# Altium PCB InterfaceComUsuario.PcbDoc
Units mm, origin at the board's own origin, x right, y up, seen from the top; angles counter-clockwise.
Board outline 65.02 x 120.02 mm, 2 copper layers (Top Layer, Bottom Layer); 33 components, 38 nets, 130 pads, 14 vias.
Unrouted connection lines stored in the file: 5.
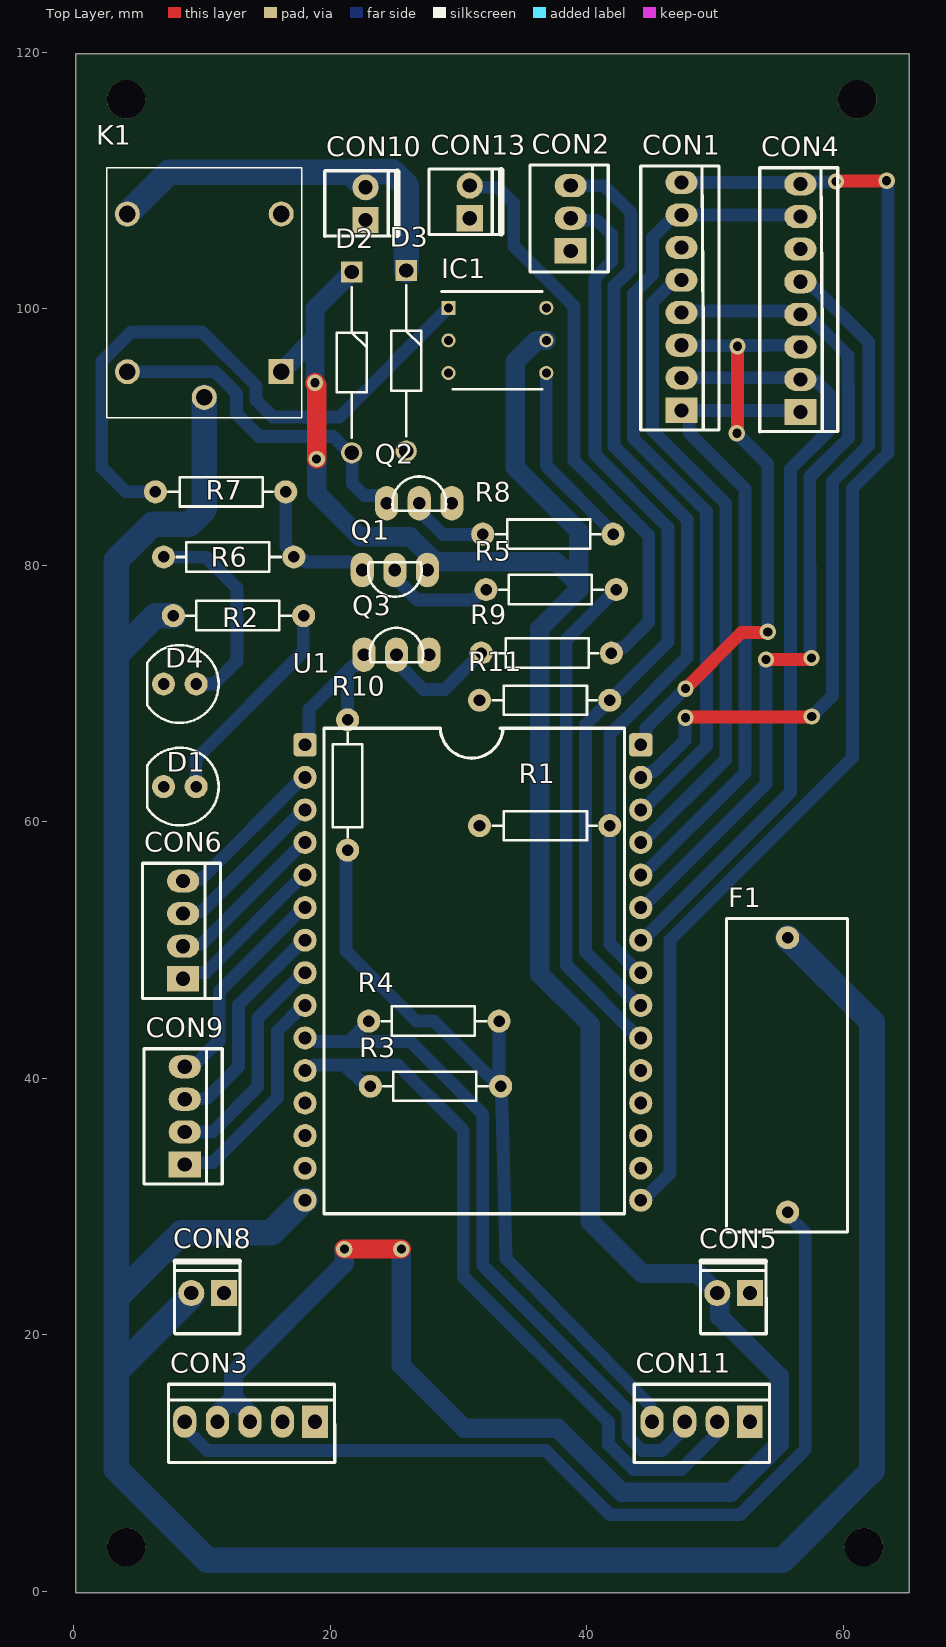
[diagram p0: Top Layer view]
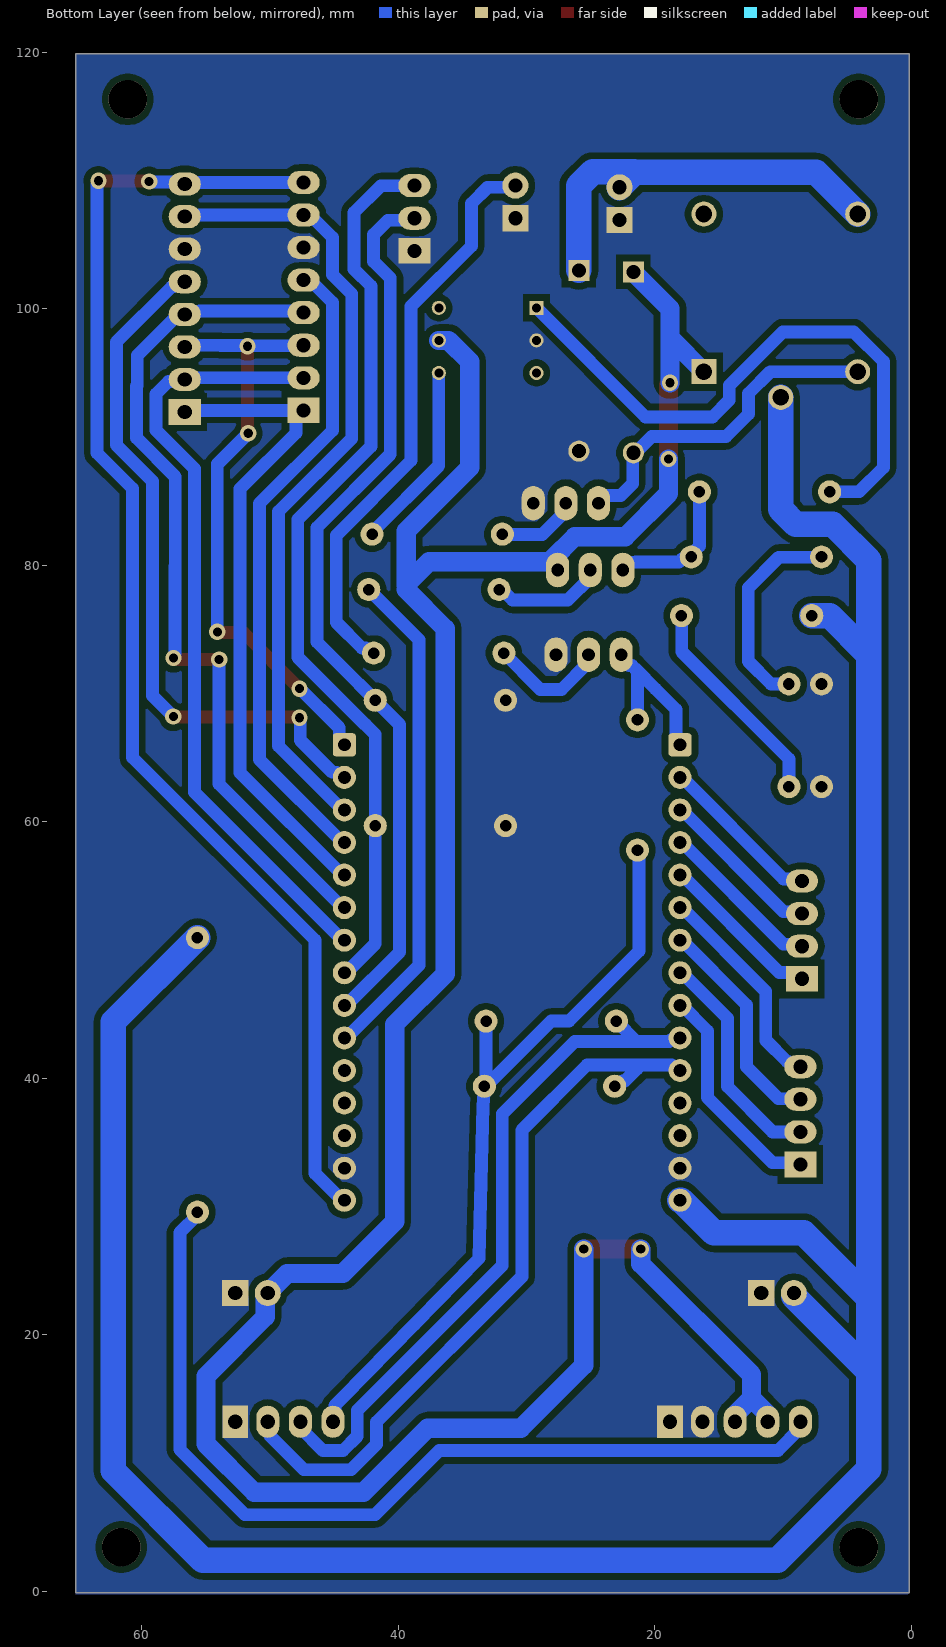
[diagram p1: Bottom Layer view, seen from below]

## Layer stack, top to bottom
Top Solder: solder mask 0.0102, Solder Resist, Dk 3.5
Top Layer: signal copper 0.0356
Dielectric 1: dielectric 0.32, FR-4, Dk 4.8
Bottom Layer: signal copper 0.0356
Bottom Solder: solder mask 0.0102, Solder Resist, Dk 3.5

## Board outline
0.127,-0.127 65.151,-0.127 65.151,119.888 0.127,119.888

## Design rules (kind name [scope] priority, off if disabled: settings)
Clearance [All] p1: gap=0.5 ignorepadtopadclearanceinfootprint=FALSE except(0: Arc-Text Arc-Hole Track-Text Track-Hole SMDPad-Text SMDPad-Hole THPad-Text THPad-Hole Via-Text Via-Hole Fill-Text Fill-Hole Poly-Text Poly-Hole Region-Text Region-Hole Text-Text Text-Hole)
ComponentClearance [All] p1: gap=0.3 collisioncheckmode=3 verticalgap=0.254 showdistances=FALSE
HoleSize [All] p1: absolutevalues=TRUE maxlimit=3 minlimit=0.75 maxpercent=80.000 minpercent=20.000
HoleToHoleClearance [All] p1: gap=0.1 allowstackedmicrovias=TRUE
MinimumSolderMaskSliver [All] p1: minsoldermaskwidth=0.05
PolygonConnect [All] p1: connectstyle=Relief reliefconductorwidth=0.254 reliefentries=4 polygonreliefangle="90 Angle" airgapwidth=0.254
RoutingVias [All] p1: holewidth=0.9 width=2 viastyle="Through Hole" minholewidth=0.9 minwidth=2 maxholewidth=0.9 maxwidth=2
SilkToSilkClearance [All] p1: silktosilkclearance=0
SilkToSolderMaskClearance [IsPad] p1: minsilkscreentomaskgap=0 clearancetoexposedcopper=TRUE
SolderMaskExpansion [All] p1: expansion=0.102 istentingtop=FALSE
Width [All] p1: maxlimit=4 minlimit=0.7 preferedwidth=1 minimp=50.000000 maximp=50.000000 favimp=50.000000
24 further rules are at their usual default settings.

## Components (designator, comment, footprint, x,y, rotation, side; value= is the part's Value field where it differs from the comment)
CON1 "KK_2.54_8vias" KK_8vias_180° 47.371,92.075 r90 top
CON2 "KK_2.54_3vias" KK_3vias_180º 38.735,104.521 r90 top
CON3 "KK_2.54_5vias" KK_5vias_180° 18.796,13.208 r180 top
CON4 "KK_2.54_8vias" KK_8vias_180° 56.642,91.948 r90 top
CON5 "KK_2.54_2vias" KK_2VIAS_180º 52.705,23.241 r180 top
CON6 "KK_2.54_4vias" KK_4vias_180° 8.509,47.752 r90 top
CON8 "KK_2.54_2vias" KK_2VIAS_180º 11.684,23.241 r180 top
CON9 "KK_2.54_4vias" KK_4vias_180° 8.636,33.274 r90 top
CON10 "KK_2.54_2vias" KK_2VIAS_180º 22.733,106.934 r90 top
CON11 "KK_2.54_4vias" KK_4vias_180° 52.705,13.208 r180 top
CON13 "KK_2.54_2vias" KK_2VIAS_180º 30.861,107.061 r90 top
D1 "LED 5MM RED" "LED 5MM RED" 8.255,62.738 r180 top
D2 "1N4007-E3_53" DIOAD1405W89L465D235 21.658,102.87 r270 top
D3 "1N4007-E3_53" DIOAD1405W89L465D235 25.908,102.997 r270 top
D4 "LED 5MM RED" "LED 5MM RED" 8.255,70.739 r180 top
F1 "Fuse 5x20" "Fuse 5x20" 55.626,40.005 r270 top
IC1 "4N25" DIP762W50P254L712H450Q6N 33.02,97.536 r0 top
K1 "rele T73" JQC3FT731Z12VDC 16.16,95.091 r90 top
Q1 "BC549" TO92 25.019,79.629 r180 top
Q2 "BC549" TO92 26.924,84.836 r0 top
Q3 "BC549" TO92 25.146,73.025 r0 top
R1 "RES 470R 1/4W CARBON FILM" "RES 470R 1/4W CARBON FILM" 36.703,59.69 r0 top
R2 "RES 470R 1/4W CARBON FILM" "RES 470R 1/4W CARBON FILM" 12.827,76.073 r180 top
R3 "4.7K" "RES 4.7K 1/4W CARBON FILM" 28.194,39.37 r180 top
R4 "4.7K" "RES 4.7K 1/4W CARBON FILM" 28.067,44.45 r180 top
R5 "RES 470R 1/4W CARBON FILM" "RES 470R 1/4W CARBON FILM" 37.211,78.105 r180 top
R6 "RES 470R 1/4W CARBON FILM" "RES 470R 1/4W CARBON FILM" 12.065,80.645 r180 top
R7 "RES 470R 1/4W CARBON FILM" "RES 470R 1/4W CARBON FILM" 11.43,85.725 r0 top
R8 "RES 470R 1/4W CARBON FILM" "RES 470R 1/4W CARBON FILM" 36.957,82.423 r0 top
R9 "RES 470R 1/4W CARBON FILM" "RES 470R 1/4W CARBON FILM" 36.83,73.152 r0 top
R10 "RES 470R 1/4W CARBON FILM" "RES 470R 1/4W CARBON FILM" 21.336,62.865 r270 top
R11 "RES 470R 1/4W CARBON FILM" "RES 470R 1/4W CARBON FILM" 36.703,69.469 r0 top
U1 "microcontrolador" ESP32_Desvikit_v1 18.021,66 r0 top value="ESP32 Desvikit V1"

## Footprints (in the part's own frame and the unit in brackets; to place one, negate y for a bottom-side part, rotate by r counter-clockwise, add the part's x,y. Pads: shape width x height; smd on the part's side, far side on the other; paste and mask are expansions set on the pad)
DIOAD1405W89L465D235 [mm]
  rect 1.65x1.65 hole 1.1: 1(0,0)
  round 1.65 hole 1.1: 2(14.1,0)
  silkscreen extent 1.17,-1.17 12.93,1.17, body extent -0.44,-1.35 14.5,1.35, height 2.69
DIP762W50P254L712H450Q6N [mm]
  rect 1.1x1.1 hole 0.7: 1(-3.81,2.54)
  round 1.1 hole 0.7: 2(-3.81,0) 3(-3.81,-2.54) 4(3.81,-2.54) 5(3.81,0) 6(3.81,2.54)
  silkscreen extent -4.36,-3.81 3.5,3.81, body extent -3.94,-3.56 3.94,3.56, height 4.5
ESP32_Desvikit_v1 [mm]
  rrect25% 1.8x1.8 hole 1: 1(0,0) 30(26.175,0)
  round 1.8 hole 1: 2(0,-2.54) 3(0,-5.08) 4(0,-7.62) 5(0,-10.16) 6(0,-12.7) 7(0,-15.24) 8(0,-17.78) 9(0,-20.32) 10(0,-22.86) 11(0,-25.4) 12(0,-27.94) 13(0,-30.48) 14(0,-33.02) 15(0,-35.52) 16(26.175,-35.52) 17(26.175,-33.02) 18(26.175,-30.48) 19(26.175,-27.94) 20(26.175,-25.4) 21(26.175,-22.86) 22(26.175,-20.32) 23(26.175,-17.78) 24(26.175,-15.24) 25(26.175,-12.7) 26(26.175,-10.16) 27(26.175,-7.62) 28(26.175,-5.08) 29(26.175,-2.54)
  silkscreen extent 1.47,-36.57 24.9,1.31, body extent -1.2,-46.07 27.48,4.86, height 16.2
"Fuse 5x20" [mm] "Connector; Header; 5 Position"
  round 1.8 hole 0.9: 1(-10.95,0.025) 2(10.45,0.025)
  silkscreen extent -12.45,-4.75 12,4.7, body extent -12.42,-4.78 11.97,4.63, height 12
JQC3FT731Z12VDC [mm]
  rect 1.95x1.95 hole 1.3: 1(0,0)
  round 1.95 hole 1.3: 2(-2,6) 3(0,12) 4(12.3,0) 5(12.3,12)
  silkscreen extent -3.6,-1.62 15.9,13.62, body extent -3.6,-1.62 15.9,13.62, height 15.6
KK_2VIAS_180º [mil]
  rect 80x80 hole 43.31: 1(0,0)
  round 80 hole 43.31: 2(100,0)
  silkscreen extent -50,-101 151,125, body extent -61,-108 165,128, height 464
KK_3vias_180º [mm]
  rect 2x2.5 hole 1.1: 1(0,0)
  oval 1.8x2.5 hole 1.1: 2(2.54,0) 3(5.08,0)
  silkscreen extent -1.65,-2.92 6.69,3.18, body extent -1.6,-2.95 6.69,3.05, height 11.9
KK_4vias_180° [mm]
  rect 2x2.5 hole 1.1: 1(0,0)
  oval 1.8x2.5 hole 1.1: 2(2.54,0) 3(5.08,0) 4(7.62,0)
  silkscreen extent -1.53,-2.92 9.02,3.18, body extent -1.4,-2.79 8.76,3.01, height 10.12
KK_5vias_180° [mm]
  rect 2x2.5 hole 1.1: 1(0,0)
  oval 1.8x2.5 hole 1.1: 2(2.54,0) 3(5.08,0) 4(7.62,0) 5(10.16,0)
  silkscreen extent -1.53,-2.92 11.43,3.18, body extent -1.4,-2.79 11.3,3.01, height 10.12
KK_8vias_180° [mm]
  rect 2x2.5 hole 1.1: 1(0,0)
  oval 1.8x2.5 hole 1.1: 2(2.54,0) 3(5.08,0) 4(7.62,0) 5(10.16,0) 6(12.7,0) 7(15.24,0) 8(17.78,0)
  silkscreen extent -1.53,-2.92 19.05,3.18, body extent -1.4,-2.74 18.92,3.1, height 10.1
"LED 5MM RED" [mm]
  round 1.8 hole 0.9: 1(-1.27,0) 2(1.27,0)
  silkscreen extent -3.03,-3.03 2.54,3.03, body extent -2.98,-3.01 2.44,3.01, height 9.31
"RES 4.7K 1/4W CARBON FILM" [mm]
  round 1.8 hole 0.9: 1(-5.08,0) 2(5.08,0)
  silkscreen extent -4.06,-1.14 4.06,1.14, body extent -5.47,-1.27 5.47,1.27, height 3.27
"RES 470R 1/4W CARBON FILM" [mm]
  round 1.8 hole 0.9: 1(-5.08,0) 2(5.08,0)
  silkscreen extent -4.06,-1.14 4.06,1.14, body extent -5.47,-1.27 5.47,1.27, height 3.27
TO92 [mm]
  oval 1.8x2.7 hole 1: 1(-2.54,0) 2(0,0) 3(2.54,0)
  silkscreen extent -2.09,-0.6 2.09,2.08, body extent -2.74,-0.57 2.74,2.04, height 6.83

## Part data
CON1 CON4: "Conector KK 2.54mm 8 vias", Descrição="Conector KK 3 vias com passo 2.54mm", Encapsulamento="PTH - 180º", Modelo="3 vias - 180º", Valor="KK 8 vias 180º"
CON2: "Conector KK 2.54mm 3 vias", Descrição="Conector KK 3 vias com passo 2.54mm", Encapsulamento="PTH - 180º", Modelo="3 vias - 180º", Valor="KK 3 vias 180º"
CON3: "Conector KK 2.54mm 5 vias", Descrição="Conector KK 3 vias com passo 2.54mm", Encapsulamento="PTH - 180º", Modelo="3 vias - 180º", Valor="KK 5 vias 180º"
CON5 CON8 CON10 CON13: "Conector KK 2.54mm 2 vias", Descrição="Conector KK 3 vias com passo 2.54mm", Encapsulamento="PTH - 180º", Modelo="2 vias - 180º", Valor="KK 2 vias 180º"
CON6 CON9 CON11: "Conector KK 2.54mm 4 vias", Descrição="Conector KK 3 vias com passo 2.54mm", Encapsulamento="PTH - 180º", Modelo="3 vias - 180º", Valor="KK 4 vias 180º"
D1 D4: Current If Luminous Intensity=2, Forward Current If=20, Forward Voltage VF Max=2.5, LED Colour=Red, Manufacturer=Paralight, Manufacturer Part Number=IMP585, Operating Temperature Max=85, Operating Temperature Min=-40, Operating Temperature Range="-40°C to +85", Peak Forward Current=7, Supplier Part Number 1="Led 3mm Vermelho Difuso L-314HD - Paralight", Voltage Vf Typ="2.2V<!--FANDB--><div class=\"features-and-benefits-container\"><div class=\"features-and-benefits-description\"><span class=\"features-benefits-value\">The L-934LID from Kingbright is a through hole round shape high efficiency red colour LED. The device is made of gallium arsenide phosphide on gallium phosphide orange light emitting diode. This LED is widely used because of low power consumption, long life and solid state reliability.</span></div><div class=\"features-and-benefits-list\"><ul class=\"features-and-benefits-list-list\"><li class=\"features-and-benefits-list-item\">Standard bulb size of T-1 (3mm)</li><li class=\"features-and-benefits-list-item\">Reliable and rugged</li><li class=\"features-and-benefits-list-item\">Viewing angle is 60°</li><li class=\"features-and-benefits-list-item\">Luminous intensity of 3mcd at 2mA</li><li class=\"features-and-benefits-list-item\">Forward voltage is 2.0V</li><li class=\"features-and-benefits-list-item\">Forward current (If) is 20mA</li><li class=\"features-and-benefits-list-item\">Dominant wavelength is 625nm at IF=20mA</li><li class=\"features-and-benefits-list-item\">Peak wavelength is 627nm at IF=20", Bulb Size=3mm, ComponentLink1Description=http://loja.multcomercial.com.br/led-3mm-vermelho-difuso-l-314hd-paralight.html, ComponentLink1URL=http://loja.multcomercial.com.br/led-3mm-vermelho-difuso-l-314hd-paralight.html, Dominant Wavelength=625, External Diameter=2.9, External Length / Height=4.6, Forward Current If Max=20, Forward Voltage=2, Lead Cross-section Depth=0.5, Lead Cross-section Width=0.5, Lead Spacing=2.54, LED / Lamp Size="3mm / T-1", LED Mounting="Through Hole", LED Type=Standard, Lens Shape=Round, Luminous Intensity=3, Luminous Intensity @ If Min=0.7, Luminous Intensity Typ=3, Mounting Type="PCB Through Hole", MSL=-, No. of Pins=2, Packaging=Each, Peak Wavelength=625, PIV Max=5, Pricing 1="1=0.15 (BRL)", RoHS=YES, Stock 1=35260, Supplier 1="Mult Comercial", SVHC="No SVHC (15-Jun-2015)", Viewing Angle=60°, Wavelength Typ=625
D2 D3: "Diode", Arrow Part Number=1N4007-E3/53, Manufacturer_Name=Vishay, Mouser Part Number=625-1N4007-E3/53, Arrow Price/Stock=https://www.arrow.com/en/products/1n4007-e353/vishay, Datasheet Link=http://www.vishay.com/docs/88503/1n4001.pdf, Manufacturer_Part_Number=1N4007-E3/53, Mouser Price/Stock=https://www.mouser.co.uk/ProductDetail/Vishay-General-Semiconductor/1N4007-E3-53/?qs=N4vtoAxH%2FSpFgYSIWmQOdg%3D%3D
F1: "Fuse", Manufacturer_Name=QIANJI, Manufacturer_Part_Number=JQC-3F-(T73)-1Z-12VDC, Datasheet Link=https://img.ozdisan.com/ETicaret_Dosya/341245_8627675.pdf, Height=15.5mm
IC1: "Integrated Circuit", Manufacturer_Name=Isocom, Arrow Part Number=4N25, Arrow Price/Stock=https://www.arrow.com/en/products/4n25/isocom, Datasheet Link=http://www.farnell.com/datasheets/90919.pdf, Height=4.5mm, Manufacturer_Part_Number=4N25
K1: "Relay or Contactor", Manufacturer_Name=QIANJI, Manufacturer_Part_Number=JQC-3F-(T73)-1Z-12VDC, Datasheet Link=https://img.ozdisan.com/ETicaret_Dosya/341245_8627675.pdf, Height=15.5mm
Q1 Q2 Q3: "TRANS NPN 30V 0.1A TO-92", Collector- Base Voltage VCBO="30 V", Collector-Emitter Saturation Voltage="200 mV", DC Current Gain hFE Max=800, Emitter- Base Voltage VEBO="5 V", Manufacturer="Fairchild Semiconductor", Maximum DC Collector Current="0.1 A", Maximum Operating Temperature="+ 150 C", Maximum Power Dissipation="0.5 W", Minimum Operating Temperature="- 65 C", Package / Case=TO-92-3, Supplier Part Number 1=512-BC549, Brand="Fairchild Semiconductor", Collector- Emitter Voltage VCEO Max="30 V", ComponentLink1Description=https://datasheet.ciiva.com/982/bc546-982130.pdf, ComponentLink1URL=https://datasheet.ciiva.com/982/bc546-982130.pdf, ComponentLink2Description=https://datasheet.ciiva.com/17179/bc549-17179663.pdf, ComponentLink2URL=https://datasheet.ciiva.com/17179/bc549-17179663.pdf, Configuration=Single, DC Collector/Base Gain hfe Min=110, Factory Pack Quantity=2000, Gain Bandwidth Product fT="300 MHz", Manufacturer Part Number=BC549, Mounting Style="Through Hole", Packaging=Bulk, Product Category="Bipolar Transistors - BJT", RoHS=Details, Series=BC549, Supplier 1=Mouser, Transistor Polarity=NPN
R1 R11: "RES 470R OHM 1/4W 5% CARBON FILM", Manufacturer=Ty-Ohm, Manufacturer Part Number=CR25, Operating Temperature="-55°C ~ 155°C", Package / Case=Axial, Power (Watts)="0.25W, 1/4W", Resistance (Ohms)=470R, Supplier Part Number 1="Resistor de Filme de Carbono 1/4 de Watt CR25 5% de tolerância - 0.22R Ω à 10M Ω", Temperature Coefficient="0/ -500ppm/°C", Tolerance=±5%, Category=Resistors, ComponentLink1Description=http://loja.multcomercial.com.br/resistor-de-1-4-de-watt-cr25-5-de-tolerancia.html, ComponentLink1URL=http://loja.multcomercial.com.br/resistor-de-1-4-de-watt-cr25-5-de-tolerancia.html, Composition="Carbon Film", Features="Flame Retardant Coating, Safety", Height=-, Number of Terminations=2, Packaging="Cut Tape (CT)", Pricing 1="1=0.20 (BRL)", RoHS="RoHS Compliant", Size / Dimension="0.091\" Dia x 0.256\" L (2.30mm x 6.50mm)", Stock 1=617543, Supplier 1="Mult Comercial", Supplier Device Package=Axial
R2: "RES 470R OHM 1/4W 5% CARBON FILM", Manufacturer=Ty-Ohm, Manufacturer Part Number=CR25, Operating Temperature="-55°C ~ 155°C", Package / Case=Axial, Power (Watts)="0.25W, 1/4W", Resistance (Ohms)=910R, Supplier Part Number 1="Resistor de Filme de Carbono 1/4 de Watt CR25 5% de tolerância - 0.22R Ω à 10M Ω", Temperature Coefficient="0/ -500ppm/°C", Tolerance=±5%, Category=Resistors, ComponentLink1Description=http://loja.multcomercial.com.br/resistor-de-1-4-de-watt-cr25-5-de-tolerancia.html, ComponentLink1URL=http://loja.multcomercial.com.br/resistor-de-1-4-de-watt-cr25-5-de-tolerancia.html, Composition="Carbon Film", Features="Flame Retardant Coating, Safety", Height=-, Number of Terminations=2, Packaging="Cut Tape (CT)", Pricing 1="1=0.20 (BRL)", RoHS="RoHS Compliant", Size / Dimension="0.091\" Dia x 0.256\" L (2.30mm x 6.50mm)", Stock 1=617543, Supplier 1="Mult Comercial", Supplier Device Package=Axial
R3 R4: library part "RES 4.7K 1/4W CARBON FILM", "RES 4.7K OHM 1/4W 5% CARBON FILM", Manufacturer=Ty-Ohm, Manufacturer Part Number=CR25, Operating Temperature="-55°C ~ 155°C", Package / Case=Axial, Power (Watts)="0.25W, 1/4W", Resistance (Ohms)=?, Supplier Part Number 1="Resistor de Filme de Carbono 1/4 de Watt CR25 5% de tolerância - 0.22R Ω à 10M Ω", Temperature Coefficient="0/ -500ppm/°C", Tolerance=±5%, Category=Resistors, ComponentLink1Description=http://loja.multcomercial.com.br/resistor-de-1-4-de-watt-cr25-5-de-tolerancia.html, ComponentLink1URL=http://loja.multcomercial.com.br/resistor-de-1-4-de-watt-cr25-5-de-tolerancia.html, Composition="Carbon Film", Features="Flame Retardant Coating, Safety", Height=-, Number of Terminations=2, Packaging="Cut Tape (CT)", Pricing 1="1=0.20 (BRL)", RoHS="RoHS Compliant", Size / Dimension="0.091\" Dia x 0.256\" L (2.30mm x 6.50mm)", Stock 1=617543, Supplier 1="Mult Comercial", Supplier Device Package=Axial
R5 R6: "RES 470R OHM 1/4W 5% CARBON FILM", Manufacturer=Ty-Ohm, Manufacturer Part Number=CR25, Operating Temperature="-55°C ~ 155°C", Package / Case=Axial, Power (Watts)="0.25W, 1/4W", Resistance (Ohms)=1k, Supplier Part Number 1="Resistor de Filme de Carbono 1/4 de Watt CR25 5% de tolerância - 0.22R Ω à 10M Ω", Temperature Coefficient="0/ -500ppm/°C", Tolerance=±5%, Category=Resistors, ComponentLink1Description=http://loja.multcomercial.com.br/resistor-de-1-4-de-watt-cr25-5-de-tolerancia.html, ComponentLink1URL=http://loja.multcomercial.com.br/resistor-de-1-4-de-watt-cr25-5-de-tolerancia.html, Composition="Carbon Film", Features="Flame Retardant Coating, Safety", Height=-, Number of Terminations=2, Packaging="Cut Tape (CT)", Pricing 1="1=0.20 (BRL)", RoHS="RoHS Compliant", Size / Dimension="0.091\" Dia x 0.256\" L (2.30mm x 6.50mm)", Stock 1=617543, Supplier 1="Mult Comercial", Supplier Device Package=Axial
R7: "RES 470R OHM 1/4W 5% CARBON FILM", Manufacturer=Ty-Ohm, Manufacturer Part Number=CR25, Operating Temperature="-55°C ~ 155°C", Package / Case=Axial, Power (Watts)="0.25W, 1/4W", Resistance (Ohms)=100R, Supplier Part Number 1="Resistor de Filme de Carbono 1/4 de Watt CR25 5% de tolerância - 0.22R Ω à 10M Ω", Temperature Coefficient="0/ -500ppm/°C", Tolerance=±5%, Category=Resistors, ComponentLink1Description=http://loja.multcomercial.com.br/resistor-de-1-4-de-watt-cr25-5-de-tolerancia.html, ComponentLink1URL=http://loja.multcomercial.com.br/resistor-de-1-4-de-watt-cr25-5-de-tolerancia.html, Composition="Carbon Film", Features="Flame Retardant Coating, Safety", Height=-, Number of Terminations=2, Packaging="Cut Tape (CT)", Pricing 1="1=0.20 (BRL)", RoHS="RoHS Compliant", Size / Dimension="0.091\" Dia x 0.256\" L (2.30mm x 6.50mm)", Stock 1=617543, Supplier 1="Mult Comercial", Supplier Device Package=Axial
R8: "RES 470R OHM 1/4W 5% CARBON FILM", Manufacturer=Ty-Ohm, Manufacturer Part Number=CR25, Operating Temperature="-55°C ~ 155°C", Package / Case=Axial, Power (Watts)="0.25W, 1/4W", Resistance (Ohms)=xR, Supplier Part Number 1="Resistor de Filme de Carbono 1/4 de Watt CR25 5% de tolerância - 0.22R Ω à 10M Ω", Temperature Coefficient="0/ -500ppm/°C", Tolerance=±5%, Category=Resistors, ComponentLink1Description=http://loja.multcomercial.com.br/resistor-de-1-4-de-watt-cr25-5-de-tolerancia.html, ComponentLink1URL=http://loja.multcomercial.com.br/resistor-de-1-4-de-watt-cr25-5-de-tolerancia.html, Composition="Carbon Film", Features="Flame Retardant Coating, Safety", Height=-, Number of Terminations=2, Packaging="Cut Tape (CT)", Pricing 1="1=0.20 (BRL)", RoHS="RoHS Compliant", Size / Dimension="0.091\" Dia x 0.256\" L (2.30mm x 6.50mm)", Stock 1=617543, Supplier 1="Mult Comercial", Supplier Device Package=Axial
R9 R10: "RES 470R OHM 1/4W 5% CARBON FILM", Manufacturer=Ty-Ohm, Manufacturer Part Number=CR25, Operating Temperature="-55°C ~ 155°C", Package / Case=Axial, Power (Watts)="0.25W, 1/4W", Resistance (Ohms)=2200R, Supplier Part Number 1="Resistor de Filme de Carbono 1/4 de Watt CR25 5% de tolerância - 0.22R Ω à 10M Ω", Temperature Coefficient="0/ -500ppm/°C", Tolerance=±5%, Category=Resistors, ComponentLink1Description=http://loja.multcomercial.com.br/resistor-de-1-4-de-watt-cr25-5-de-tolerancia.html, ComponentLink1URL=http://loja.multcomercial.com.br/resistor-de-1-4-de-watt-cr25-5-de-tolerancia.html, Composition="Carbon Film", Features="Flame Retardant Coating, Safety", Height=-, Number of Terminations=2, Packaging="Cut Tape (CT)", Pricing 1="1=0.20 (BRL)", RoHS="RoHS Compliant", Size / Dimension="0.091\" Dia x 0.256\" L (2.30mm x 6.50mm)", Stock 1=617543, Supplier 1="Mult Comercial", Supplier Device Package=Axial
U1: library part "ESP32 Desvikit v1", "microcontrolador com moculo bluethoth e wifi"

## Free pads (board coordinates)
  round 3 hole 3: 6(4.064,116.332) 6(61.087,116.332) 7(61.595,3.429) 8(4.064,3.429)

## Via types
v1: diameter 1.27, hole 0.711, Top Layer to Bottom Layer, 14 vias

## Nets (pads, with @x,y where several pads share a name; then routed paths per layer and width w, separated by ;. In a path a pad name is that pad's centre, name@x,y a point inside that pad or via, vN(x,y) a via of type N, cw(c..) or ccw(c..) an arc to the next point about the centre after c; other vN are vias at no path point)
3V3: CON11.4 R3.1 R4.1 R10.2 | length 59.7
  Bottom Layer w1: R10.2@21.209,57.251 21.209,49.911 26.67,44.45 28.067,44.45 33.147,39.37 R3.1 ; R4.1 33.147,39.497 R3.1 ; CON11.4 44.932,13.361 44.932,14.465 44.353,15.057 38.733,20.801 33.695,25.952 33.377,37.832 R3.1
3V3p: CON1.8 CON4.8 U1.16 | length 102.6
  Top Layer w1: v1(59.42,109.932) 59.446,109.957 63.348,109.957 v1(63.373,109.982)
  Bottom Layer w1: U1.16 44.383,30.48 46.482,32.579 46.482,50.778 60.706,65.002 60.706,85.979 63.476,88.749 63.476,109.688 63.425,109.739 63.425,109.93 v1(63.373,109.982) ; CON1.8 CON4.8@55.499,109.855 ; CON4.8 56.794,109.88 59.369,109.88 v1(59.42,109.932)
+5: CON3.3 CON3.4 CON5.2 D2.1 IC1.5 K1.1 Q1.1 | length 215.5
  Top Layer w1.5: v1(18.796,94.234) 18.796,94.161 18.923,94.034 v1(18.923,88.281) ; v1(21.082,26.67) v1(25.527,26.67)
  Bottom Layer w1.5: CON3.4 11.176,13.774 12.446,15.044 ; CON3.3 13.716,13.774 12.446,15.044 ; K1.1 18.685,97.616 18.796,97.504 ; v1(18.796,94.234) 18.796,97.504 ; v1(18.923,88.281) 18.923,85.598 22.292,82.229 26.229,82.229 Q1.1@28.01,80.448 ; v1(21.082,26.67) 21.082,25.527 12.446,16.891 12.446,15.044 ; D2.1 18.796,100.008 18.796,97.504 ; v1(25.527,26.67) 25.527,17.615 30.434,12.708 37.711,12.708 42.711,7.708 51.223,7.708 54.991,11.476 54.991,16.764 50.362,21.393 50.362,23.044 CON5.2 48.641,24.765 44.323,24.765 40.259,28.829 40.259,44.196 36.322,48.133 36.322,75.057 39.37,78.105 ; Q1.1 28.194,80.264 37.592,80.264 39.37,78.486 39.37,82.677 34.417,87.63 34.417,95.885 36.068,97.536 IC1.5
+12: CON8.2 F1.1 K1.2 R2.2 U1.15 | length 229.2
  Bottom Layer w2: R2.2 6.35,76.073 3.302,73.025 ; CON8.2 9.144,22.987 3.302,17.145 ; K1.2 10.16,84.357 8.988,83.185 6.096,83.185 3.302,80.391 3.302,73.025 ; U1.15 17.924,30.48 15.384,27.94 8.382,27.94 3.302,22.86 ; F1.1 62.23,44.376 62.23,9.398 55.245,2.413 10.414,2.413 3.302,9.525 3.302,17.145 ; 3.302,17.145 3.302,22.86 ; 3.302,22.86 3.302,73.025
-motor_d1: CON6.2 U1.4 | length 12.9
  Bottom Layer w1: CON6.2 8.662,50.445 9.939,50.445 17.874,58.38 U1.4
-motor_d2: CON6.4 U1.2 | length 12.9
  Bottom Layer w1: CON6.4 8.662,55.525 9.939,55.525 17.874,63.46 U1.2
-motor_e1: CON9.2 U1.8 | length 17.6
  Bottom Layer w1: CON9.2 10.795,35.814 14.327,39.346 14.327,44.673 17.874,48.22 U1.8
-motor_e2: CON9.4 U1.6 | length 16.8
  Bottom Layer w1: CON9.4 9.202,40.894 9.602,41.294 9.671,41.294 11.327,42.95 11.327,46.753 17.874,53.3 U1.6
buttom: CON2.2 R11.2 U1.22 | length 71.2
  Bottom Layer w1: CON2.2 38.888,106.908 40.793,106.908 41.91,105.791 41.91,103.684 40.621,102.395 40.621,88.651 46.324,82.948 46.324,74.01 39.883,67.569 39.883,60.477 39.883,49.846 44.049,45.68 U1.22
buttom_2: CON2.3 R1.2 U1.23 | length 71.4
  Bottom Layer w1: CON2.3 41.338,109.601 43.434,107.505 43.434,103.086 42.121,101.773 42.121,89.272 47.824,83.569 47.824,72.823 42.57,67.569 42.55,67.569 41.783,66.802 R1.2 41.783,50.486 44.049,48.22 U1.23
en: Q3.1 R10.1 U1.1 | length 12.7
  Bottom Layer w1: U1.1@17.988,66.057 18.331,66.4 18.331,68.75 19.922,70.341 21.389,71.808 21.756,72.175 21.99,72.175 22.606,72.791 Q3.1 ; R10.1 21.336,71.589
GND: CON1.6 CON2.1 CON3.1 CON3.2 CON4.6 CON5.1 CON8.1 CON10.1 CON11.1 CON13.1 D1.2 D3.2 D4.2 IC1.2 Q2.3 Q3.3 R1.1 R11.1 U1.14 U1.17
MISO: CON1.4 CON4.4 U1.25 | length 65.2
  Top Layer w1: v1(53.959,72.644) 57.315,72.644 57.442,72.771 v1(57.515,72.771)
  Bottom Layer w1: U1.25 44.343,53.3 53.975,62.932 53.975,72.628 v1(53.959,72.644) ; CON1.4 47.498,99.822 CON4.4@55.476,99.822 ; CON4.4 57.139,99.568 60.349,96.358 60.349,94.027 60.392,93.984 60.392,89.912 57.38,86.9 57.38,79.94 57.404,79.916 57.404,73.073 57.463,73.014 57.463,72.823 v1(57.515,72.771)
MOSI: CON1.3 CON4.3 U1.30 | length 45.6
  Top Layer w1: v1(47.689,70.376) 52.065,74.751 54.05,74.751 v1(54.102,74.803) ; v1(51.689,90.297) 51.741,90.349 v1(51.741,97.08)
  Bottom Layer w1: U1.30 44.596,66.4 44.596,67.329 47.643,70.376 v1(47.689,70.376) ; CON1.3 47.409,97.117 51.703,97.117 v1(51.741,97.08) 51.792,97.131 53.865,97.131 53.889,97.155 CON4.3@55.499,97.155 ; v1(51.689,90.297) 54.102,87.884 v1(54.102,74.803)
motor_d1: CON6.1 U1.5 | length 12.9
  Bottom Layer w1: CON6.1 9.009,48.252 10.286,48.252 17.874,55.84 U1.5
motor_d2: CON6.3 U1.3 | length 12.9
  Bottom Layer w1: CON6.3 8.662,52.985 9.939,52.985 17.874,60.92 U1.3
motor_e1: CON9.1 U1.9 | length 17.6
  Bottom Layer w1: CON9.1 8.768,33.406 10.8,33.406 15.875,38.481 15.875,43.681 17.874,45.68 U1.9
motor_e2: CON9.3 U1.7 | length 17.3
  Bottom Layer w1: CON9.3 8.683,38.401 10.334,38.401 12.827,40.894 12.827,45.713 17.874,50.76 U1.7
NetCON3_5: CON3.5 F1.2 | length 72.9
  Bottom Layer w1: CON3.5 8.636,12.711 10.389,10.958 36.794,10.958 41.794,5.958 51.948,5.958 57.023,11.033 57.023,27.967 55.651,29.339 F1.2
NetCON10_2: CON10.2 D3.1 K1.5 | length 31.8
  Bottom Layer w2: K1.5 7.41,110.641 21.566,110.641 ; CON10.2 21.566,110.641 ; CON10.2@22.742,109.468 22.748,109.468 CON10.2@22.766,109.45 ; D3.1 25.908,109.601 24.83,110.679 21.604,110.679 21.566,110.641
NetCON13_2: CON13.2 R9.2 | length 44.9
  Bottom Layer w1: CON13.2 30.988,109.474 33.02,109.474 34.29,108.204 34.29,104.902 38.989,100.203 38.989,88.162 44.824,82.327 44.824,75.558 42.818,73.552 42.526,73.552 42.126,73.152 R9.2
NetD1_1: D1.1 R2.1 | length 16.8
  Bottom Layer w1: D1.1 9.525,64.897 17.883,73.255 17.883,76.049 R2.1
NetD2_2: D2.2 K1.3 Q2.1 | length 26.9
  Bottom Layer w1: K1.3 10.988,95.091 12.685,93.394 12.685,91.785 14.439,90.031 20.221,90.031 21.482,88.77 D2.2 21.698,88.73 21.698,86.379 22.638,85.439 24.014,85.439 24.384,85.07 Q2.1
NetD4_1: D4.1 R6.2 | length 16.3
  Bottom Layer w1: R6.2 7.011,80.619 10.313,80.619 12.7,78.232 12.7,72.517 10.922,70.739 D4.1
NetIC1_1: IC1.1 R7.1 | length 48.4
  Bottom Layer w1: R7.1@6.197,85.878 R7.1 4.064,85.725 2.159,87.63 2.159,95.883 4.469,98.193 10.008,98.193 14.185,94.016 14.185,92.876 15.494,91.567 20.701,91.567 IC1.1
NetIC1_4: IC1.4 R8.2 | length 14.7
  Bottom Layer w1: IC1.4 36.83,87.757 42.037,82.55 R8.2
NetQ1_2: Q1.2 R5.2 | length 8.8
  Bottom Layer w1: Q1.2 25.019,79.032 26.772,77.279 31.089,77.279 31.915,78.105 R5.2
NetQ1_3: Q1.3 R6.1 R7.2 | length 10.5
  Bottom Layer w1: R7.2 16.51,81.496 17.145,80.861 R6.1 ; R6.1@17.864,80.492 18.092,80.264 21.493,80.264 21.525,80.232 22.109,80.232 22.479,79.863 Q1.3
NetQ2_2: Q2.2 R8.1 | length 6.3
  Bottom Layer w1: Q2.2 26.924,84.239 28.765,82.398 31.852,82.398 R8.1
NetQ3_2: Q3.2 R9.1 | length 9.3
  Bottom Layer w1: Q3.2 25.146,72.428 27.257,70.317 28.915,70.317 R9.1
RST: CON1.7 CON4.7 U1.28 | length 60.9
  Bottom Layer w1: U1.28 44.343,60.92 49.324,65.901 49.324,84.191 43.621,89.894 43.621,101.152 45.121,102.652 45.121,105.562 46.874,107.315 CON4.7@55.499,107.315
sc1: CON1.5 U1.27 | length 50.3
  Bottom Layer w1: U1.27 44.343,58.38 50.824,64.861 50.824,84.812 45.121,90.515 45.121,100.482 46.874,102.235 CON1.5
sc2: CON4.5 U1.29 | length 54.6
  Top Layer w1: v1(47.689,68.11) 47.734,68.154 57.486,68.154 v1(57.531,68.199)
  Bottom Layer w1: U1.29 44.412,63.46 44.812,63.86 45.138,63.86 47.637,66.359 47.637,68.058 v1(47.689,68.11) ; CON4.5 57.208,102.108 57.608,101.708 57.677,101.708 61.976,97.409 61.976,89.375 59.15,86.549 59.15,69.818 v1(57.531,68.199)
SCK: CON1.2 CON4.2 U1.24 | length 59.6
  Bottom Layer w1: U1.24 44.343,50.76 55.88,62.297 55.88,87.522 58.892,90.534 58.892,93.362 57.919,94.335 56.795,94.335 CON4.2 ; CON1.2 CON4.2@55.499,94.615
SCL_IN: CON11.2 R3.2 U1.11 | length 57.9
  Bottom Layer w1: U1.11 18.237,40.6 18.658,41.021 21.082,41.021 ; R3.2 22.898,39.37 22.498,39.77 22.333,39.77 21.375,40.728 21.082,41.021 ; CON11.2 50.012,13.055 50.012,12.128 47.342,9.458 43.677,9.458 41.685,11.45 41.685,13.179 30.353,24.511 30.353,35.941 25.273,41.021 22.089,41.021 21.668,41.021 21.082,41.021
SDA: CON1.1 CON4.1 U1.26 | length 49.2
  Bottom Layer w1: U1.26 44.343,55.84 52.324,63.821 52.324,85.96 47.975,90.308 47.975,91.575 47.798,91.752 47.475,92.075 CON1.1 ; CON1.1@48.121,92.075 CON4.1@55.499,92.075
SDA_IN: CON11.3 R4.2 U1.10 | length 54.5
  Bottom Layer w1: U1.10 18.174,42.987 18.74,42.987 18.86,42.866 21.403,42.866 ; R4.2 21.403,42.866 ; CON11.3 47.625,12.711 45.872,10.958 44.298,10.958 43.185,12.071 43.185,14.091 31.877,25.399 31.877,37.211 31.584,37.504 26.222,42.866 21.403,42.866
trava: R5.1 U1.21 | length 39.1
  Bottom Layer w1: R5.1 38.383,74.197 38.383,48.806 44.049,43.14 U1.21
pads on no net: IC1.3 IC1.6 K1.4 U1.12 U1.13 U1.18 U1.19 U1.20

## Polygon pours and split planes (outlines as drawn)
GND on Bottom Layer "NONET_L-01_P-001" (solid, pour order 0): 0.127,-0.127 0.254,-0.254 65.151,-0.254 65.151,120.015 65.024,119.888 0.127,119.888

## Text inside footprints (layer, text, board x,y; h text height)
D1: Mechanical 29 "A" at 9.398,64.262 h0.5 r180; Mechanical 29 "K" at 7.62,64.262 h0.5 r180
D4: Mechanical 29 "A" at 9.398,72.263 h0.5 r180; Mechanical 29 "K" at 7.62,72.263 h0.5 r180
Q1: Mechanical 29 "1" at 28.219,78.229 h0.5 r180
Q2: Mechanical 29 "1" at 23.724,86.236 h0.5
Q3: Mechanical 29 "1" at 21.946,74.425 h0.5
R1: Mechanical 29 "1" at 32.766,58.674 h0.5
R2: Mechanical 29 "1" at 16.764,77.089 h0.5 r180
R3: Mechanical 29 "1" at 32.131,40.386 h0.5 r180
R4: Mechanical 29 "1" at 32.004,45.466 h0.5 r180
R5: Mechanical 29 "1" at 41.148,79.121 h0.5 r180
R6: Mechanical 29 "1" at 16.002,81.661 h0.5 r180
R7: Mechanical 29 "1" at 7.493,84.709 h0.5
R8: Mechanical 29 "1" at 33.02,81.407 h0.5
R9: Mechanical 29 "1" at 32.893,72.136 h0.5
R10: Mechanical 29 "1" at 20.32,66.802 h0.5 r270
R11: Mechanical 29 "1" at 32.766,68.453 h0.5